# Altium PCB 606-100863-r02.pcbdoc (part 2 of 2)
Units mm, origin at the board's own origin, x right, y up, seen from the top; angles counter-clockwise.
Board outline 84 x 22 mm, 2 copper layers (Top Layer, Bottom Layer), stack 1.471 mm thick; 42 components, 21 nets, 119 pads, 46 vias.
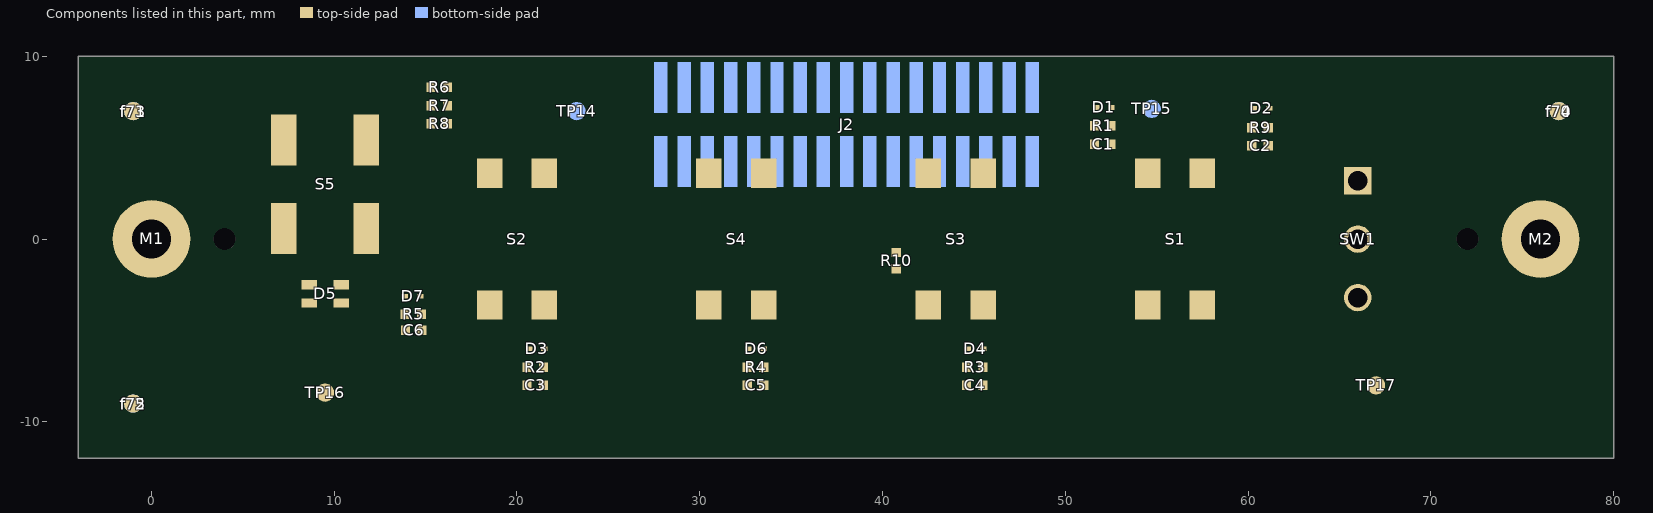
[diagram p2: the components of this part, seen from the top]

## Silkscreen, mask and mechanical layers (free items; w line width, h text height) (continued)
ASY_DWG_R:
  lines w0.3: -351.63,-119.37 -210.63,-119.37 ; -351.63,-85.37 -210.63,-85.37 ; -350.63,-103.37 -210.63,-103.37 ; -319.63,-119.37 -319.63,-103.37 ; -223.63,-119.37 -223.63,-103.37 ; -210.63,-125.37 -210.63,-65.37
  lines w0.508: -131.652,375.834 -131.652,388.788 ; -131.652,375.834 -131.652,388.788 ; -131.652,375.834 -131.652,388.788 ; -371.174,-0.721 -351.87,-0.721 -371.174,-0.721 ; -371.174,-0.264 -351.87,-0.264 -371.174,-0.264 ; -371.174,124.704 -351.87,124.704 -371.174,124.704 ; -371.174,125.161 -351.87,125.161 -371.174,125.161 ; -371.174,250.129 -351.87,250.129 -371.174,250.129 ; -371.174,250.586 -351.87,250.586 -371.174,250.586 ; -241.888,-138.821 -241.888,-125.867 -241.888,-138.821 ; -241.863,375.834 -241.863,388.788 -241.863,375.834 ; -241.431,-138.821 -241.431,-125.867 -241.431,-138.821 ; -241.406,376.088 -241.406,388.788 -241.406,376.088 ; -131.195,375.834 -131.195,388.788 -131.195,375.834 ; -21.442,375.834 -21.442,388.788 -21.442,375.834 ; -20.985,375.834 -20.985,388.788 -20.985,375.834 ; 88.82,-138.821 88.82,-125.867 88.82,-138.821 ; 88.82,375.834 88.82,388.788 88.82,375.834 ; 89.277,-138.821 89.277,-125.867 89.277,-138.821 ; 89.277,375.834 89.277,388.788 89.277,375.834 ; 199.056,-138.821 199.056,-125.867 199.056,-138.821 ; 199.056,375.834 199.056,388.788 199.056,375.834 ; 199.513,-138.821 199.513,-125.867 199.513,-138.821 ; 199.513,375.834 199.513,388.788 199.513,375.834 ; 309.266,-138.821 309.266,-125.867 309.266,-138.821 ; 309.266,375.834 309.266,388.788 309.266,375.834 ; 309.723,-138.821 309.723,-125.867 309.723,-138.821 ; 309.723,375.834 309.723,388.788 309.723,375.834 ; 419.655,-0.721 438.959,-0.721 419.655,-0.721 ; 419.655,-0.264 438.959,-0.264 419.655,-0.264 ; 419.655,124.678 438.959,124.678 419.655,124.678 ; 419.655,125.136 438.959,125.136 419.655,125.136 ; 419.655,250.078 438.959,250.078 419.655,250.078 ; 419.655,250.535 438.959,250.535 419.655,250.535
  lines w1: -351.63,-125.37 419.37,-125.37 419.37,375.63 -351.63,375.63 -351.63,-125.37
  lines w1.1: -130.63,-138.37 -130.63,-125.37 ; -21.63,-138.37 -21.63,-125.37
  text "1" at -294.466,379.618 h7.62
  text "6" at 256.866,379.44 h7.62
  text "5" at 146.274,379.364 h7.62
  text "7" at 366.797,379.313 h7.62
  text "2" at -184.129,379.212 h7.62
  text "3" at -74.096,379.212 h7.62
  text "4" at 36.673,379.212 h7.62
  text "NOTES: UNLESS OTHERWISE SPECIFIED" at 407.245,363.53 h2.03
  text "1   RoHS COMPLIANT ASSEMBLY REQUIRED. ASSEMBLE PER IPC-A-610, CLASS 2," at 407.145,357.03 h2.03
  text "2   AQUEOUS BASED CLEANING AFTER SOLDER FOR ALL COMPONENTS IS PREFERRED, NO-CLEAN" at 407.051,351.825 h2.03
  text "RoHS SOLDER PROCESS IS ACCEPTABLE." at 407.195,347.68 h2.03
  text "3   ITEM IDENTIFICATION: MARK REVISION NUMBER OF THIS DRAWING IN THE SPACE PROVIDED." at 407.37,341.88 h2.03
  text "D" at -356.315,309.946 h7.62
  text "D" at 428.367,309.794 h7.62
  text "C" at -356.315,184.495 h7.62
  text "C" at 428.494,184.292 h7.62
  text "B" at -356.442,58.892 h7.62
  text "B" at 428.265,58.892 h7.62
  text "ASSEMBLY BOTTOM" at 57.054,-25.345 h3.81
  text "A" at -356.188,-66.863 h7.62
  text "A" at 428.519,-66.99 h7.62
  text "1511 Sixth Ave. Suite 300, Seattle, WA 98101 206.381.0898" at -222.718,-83.37 h2.54
  text "PRINTED CIRCUIT BOARD ASSEMBLY" at -235.41,-91.87 h3.81
  text ".Board_Name" at -249.314,-100.145 h5.08
  text "REV" at -333.494,-106.37 h1.78
  text "DWG NO" at -225.63,-106.37 h1.78
  text "SIZE" at -214.782,-106.37 h1.78
  text "600-" at -241.385,-116.071 h7.62
  text ".Board_Number" at -271.085,-116.171 h7.62
  text "D" at -214.582,-116.37 h7.62
  text ".PCB_Revision" at -329.919,-116.892 h7.62
  text "SHEET 2 OF 2" at -327.086,-123.37 h1.78
  text "SCALE:4:1" at -216.222,-123.37 h1.78
  text "1" at -294.67,-135.418 h7.62
  text "5" at 146.351,-135.57 h7.62
  text "6" at 256.79,-135.57 h7.62
  text "4" at 36.902,-135.849 h7.62
  text "2" at -184.357,-135.875 h7.62
  text "3" at -73.918,-135.875 h7.62
  text "7" at 366.899,-136.434 h7.62
TITLEBLOCK:
  lines w0.25: -29.53,-63.87 91.47,-63.87 ; 28.97,-44.87 91.47,-44.87 91.47,-73.37 -29.53,-73.37 -29.53,-51.37 91.47,-51.37 ; 46.97,-73.37 46.97,-44.87 ; 46.97,-56.37 91.47,-56.37 ; 80.47,-63.87 80.47,-56.37
  text "PRODUCT" at 33.214,-47.37 h1.52
  text "1511 SIXTH AVENUE, THIRD FLOOR" at 47.97,-47.37 h1.52
  text "DEVELOPMENT" at 31.282,-50.37 h1.52
  text "SEATTLE,WA 98101  206.381.0898" at 47.97,-50.37 h1.52
  text "DATE" at 47.97,-53.37 h1.02
  text "09/22/2016" at 60.85,-54.87 h2.03
  text "PRINTED CIRCUIT BOARD" at -10.766,-55.87 h2.29
  text "PART NUMBER" at 47.97,-58.37 h1.02
  text "REV" at 84.746,-58.37 h1.02
  text ".Board_Name" at -16.5,-62 h3.81
  text "601-" at 53.625,-62.071 h2.54
  text ".Board_Number" at 63.925,-62.071 h2.54
  text ".PCB_Revision" at 83.77,-62.538 h2.54
  text "PROPRIETARY AND CONFIDENTIAL" at 52.196,-66.87 h1.52
  text "THE INFORMATION CONTAINED IN THIS DRAWING IS PROPRIETARY AND" at 50.98,-68.87 h0.76
  text "RESTRICTED. ANY REPRODUCTION IN PART OR WHOLE WITHOUT THE" at 51.892,-70.37 h0.76
  text "EXPRESS WRITTEN PERMISSION OF THE OWNER IS PROHIBITED" at 52.608,-71.87 h0.76
DXF_JULY14_TOP:
  drawing of 175 lines, arcs and shapes, not listed
  text "BOARD OUTLINE" at 36,145 h3.17
  text "PRIMARY" at -12.89,128.49 h3.17
  text "COMPONENT PLACEMENT" at 26,109 h3.17
  text "KEEP WITHIN/KEEP OUT" at 21,72 h3.17
DXF_JULY14_BOT:
  circle w0.013: c72,0 r0.6
  circle w0.013: c4,0 r0.6
  circle w0.013: c76,0 r2.5
  circle w0.013: c76,0 r1.075
  circle w0.013: c0,0 r2.5
  circle w0.013: c0,0 r1.075
  circle w0.013: c76,0 r1.075
  circle w0.013: c72,0 r0.6
  circle w0.013: c4,0 r0.6
  circle w0.013: c0,0 r1.075
  circle w0.013: c-1.629,141.596 r1.075
  circle w0.013: c2.371,141.596 r0.6
  circle w0.013: c70.371,141.596 r0.6
  circle w0.013: c74.371,141.596 r1.075
  circle w0.013: c-1.614,31.945 r1.075
  circle w0.013: c-1.614,31.945 r2.5
  circle w0.013: c74.386,31.945 r1.075
  circle w0.013: c74.386,31.945 r2.5
  circle w0.013: c2.386,31.945 r0.6
  circle w0.013: c70.386,31.945 r0.6
  circle w0.013: c0.092,93.609 r1.075
  circle w0.013: c4.092,93.609 r0.6
  circle w0.013: c72.092,93.609 r0.6
  circle w0.013: c76.092,93.609 r1.075
  lines w0.013: -4,-12 -4,10 ; -4,-12 80,-12 ; -4,-12 -4,10 ; -4,-12 80,-12 ; -4,10 80,10 ; -4,10 80,10 ; 80,-12 80,10 ; 80,-12 80,10 ; -5.629,129.596 78.371,129.596 78.371,151.596 -5.629,151.596 -5.629,129.596 ; -5.614,19.945 78.386,19.945 78.386,41.945 -5.614,41.945 -5.614,19.945 ; -3.908,81.609 80.092,81.609 80.092,103.609 -3.908,103.609 -3.908,81.609 ; 27.205,5.82 27.205,9.25 48.795,9.25 48.795,5.82 27.205,5.82 ; 27.297,99.429 48.887,99.429 48.887,102.859 27.297,102.859 27.297,99.429 ; 28.085,6.7 28.085,8.37 47.915,8.37 47.915,6.7 28.085,6.7 ; 28.177,100.309 48.007,100.309 48.007,101.979 28.177,101.979 28.177,100.309
  text "BOARD OUTLINE" at 53,157 h3.17
  text "SECONDARY" at -22,140 h3.17
  text "COMPONENT PLACEMENT" at 64,109 h3.17
  text "KEEP WITHIN/KEEP OUT" at 61,46 h3.17
DXF_JULY21_TOP:
  circle w0.013: c9.5,3 r1.75
  circle w0.013: c76,0 r1.075
  circle w0.013: c4,0 r0.6
  circle w0.013: c72,0 r0.6
  circle w0.013: c0,0 r1.075
  circle w0.013: c56,0 r1.25
  circle w0.013: c32,0 r1.25
  circle w0.013: c20,0 r1.25
  circle w0.013: c44,0 r1.25
  circle w0.013: c303.092,49.784 r1.075
  circle w0.013: c299.092,49.784 r0.6
  circle w0.013: c231.092,49.784 r0.6
  circle w0.013: c227.092,49.784 r1.075
  circle w0.013: c184.386,50.12 r0.6
  circle w0.013: c116.386,50.12 r0.6
  circle w0.013: c188.386,50.12 r2.5
  circle w0.013: c188.386,50.12 r1.075
  circle w0.013: c112.386,50.12 r2.5
  circle w0.013: c112.386,50.12 r1.075
  circle w0.013: c76.371,50.771 r1.075
  circle w0.013: c72.371,50.771 r0.6
  circle w0.013: c4.371,50.771 r0.6
  circle w0.013: c0.371,50.771 r1.075
  circle w0.013: c270.744,116.355 r1.25
  circle w0.013: c246.744,116.355 r1.25
  circle w0.013: c258.744,116.355 r1.25
  circle w0.013: c282.744,116.355 r1.25
  circle w0.013: c226.744,116.355 r1.075
  circle w0.013: c298.744,116.355 r0.6
  circle w0.013: c230.744,116.355 r0.6
  circle w0.013: c302.744,116.355 r1.075
  circle w0.013: c236.244,119.355 r1.75
  circle w0.013: c117.382,117.195 r0.6
  circle w0.013: c113.382,117.195 r1.075
  circle w0.013: c189.382,117.195 r1.075
  circle w0.013: c185.382,117.195 r0.6
  circle w0.013: c-2.5,116.775 r1.075
  circle w0.013: c1.5,116.775 r0.6
  circle w0.013: c69.5,116.775 r0.6
  circle w0.013: c73.5,116.775 r1.075
  lines w0.013: 119.382,105.195 183.382,105.195 ; 119.382,105.195 109.382,105.195 109.382,127.195 119.382,127.195 ; 119.382,105.195 119.382,127.195 ; 119.382,127.195 183.382,127.195 ; 183.382,105.195 183.382,127.195 ; 183.382,105.195 193.382,105.195 193.382,127.195 183.382,127.195 ; -6.5,104.775 -6.5,126.775 77.5,126.775 77.5,104.775 -6.5,104.775 ; -4,-12 -4,10 80,10 80,-12 -4,-12 ; -3.629,38.771 -3.629,60.771 80.371,60.771 80.371,38.771 -3.629,38.771 ; 6.5,0 6.5,6 12.5,6 12.5,0 6.5,0 ; 8.6,-3.9 8.6,-2.1 10.4,-2.1 10.4,-3.9 8.6,-3.9 ; 17.75,-2.25 22.25,-2.25 22.25,2.25 17.75,2.25 17.75,-2.25 ; 29.75,-2.25 29.75,2.25 34.25,2.25 34.25,-2.25 29.75,-2.25 ; 41.75,-2.25 46.25,-2.25 46.25,2.25 41.75,2.25 41.75,-2.25 ; 53.75,-2.25 53.75,2.25 58.25,2.25 58.25,-2.25 53.75,-2.25 ; 63.079,-5.626 68.921,-5.626 68.921,5.626 63.079,5.626 63.079,-5.626 ; 64.273,0 64.273,3.429 67.727,3.429 67.727,0 64.273,0 ; 108.386,38.12 108.386,60.12 192.386,60.12 192.386,38.12 108.386,38.12 ; 222.744,104.355 306.744,104.355 306.744,126.355 222.744,126.355 222.744,104.355 ; 223.092,37.784 223.092,59.784 307.092,59.784 307.092,37.784 223.092,37.784 ; 233.244,116.355 239.244,116.355 239.244,122.355 233.244,122.355 233.244,116.355 ; 235.344,112.455 237.144,112.455 237.144,114.255 235.344,114.255 235.344,112.455 ; 244.494,114.105 244.494,118.605 248.994,118.605 248.994,114.105 244.494,114.105 ; 254.297,55.604 254.297,59.034 275.887,59.034 275.887,55.604 254.297,55.604 ; 255.177,56.484 255.177,58.154 275.007,58.154 275.007,56.484 255.177,56.484 ; 256.494,114.105 260.994,114.105 260.994,118.605 256.494,118.605 256.494,114.105 ; 268.494,114.105 268.494,118.605 272.994,118.605 272.994,114.105 268.494,114.105 ; 280.494,114.105 284.994,114.105 284.994,118.605 280.494,118.605 280.494,114.105 ; 289.823,110.729 289.823,121.981 295.665,121.981 295.665,110.729 289.823,110.729 ; 291.017,116.355 294.471,116.355 294.471,119.784 291.017,119.784 291.017,116.355
  text "KEEP WITHIN/KEEP OUT" at 128.09,147.012 h3.17
  text "BOARD OUTLINE" at 14.923,145.752 h3.17
  text "COMPONENT PLACEMENT" at 243.916,145.131 h3.17
  text "PRIMARY" at -32.89,114.665 h3.17
  text "SECONDARY" at -36.821,51.369 h3.17
Drill Drawing:
  circle w0.254: c119.937,-8.007 r0.508
  circle w0.254: c119.937,-8.007 r0.847
  lines w0.254: 119.09,-16.05 119.513,-16.05 119.513,-16.473 120.36,-16.473 120.36,-16.05 120.783,-16.05 120.783,-15.203 120.36,-15.203 120.36,-14.78 119.513,-14.78 119.513,-15.203 119.09,-15.203 119.09,-16.05 ; 119.09,-12.24 119.513,-12.24 119.937,-12.663 120.36,-12.24 120.783,-12.24 120.36,-11.817 120.783,-11.393 120.36,-11.393 119.937,-10.97 119.513,-11.393 119.09,-11.393 119.513,-11.817 119.09,-12.24 ; 119.09,-5.043 120.783,-5.043 120.783,-3.35 119.09,-3.35 119.09,-5.043 ; 119.09,-0.387 119.937,-1.233 120.783,-0.387 119.937,0.46 119.09,-0.387 ; 119.429,-12.071 119.683,-12.071 119.937,-12.325 120.191,-12.071 120.445,-12.071 120.191,-11.817 120.445,-11.563 120.191,-11.563 119.937,-11.309 119.683,-11.563 119.429,-11.563 119.683,-11.817 119.429,-12.071
  lines w0.381: 117.571,-17.616 337.018,-17.616 ; 117.571,1.434 337.018,1.434 ; 131.564,-21.426 131.564,5.244 ; 145.276,-21.426 145.276,5.244 ; 172.954,-21.426 172.954,5.244 ; 185.803,-21.426 185.803,5.244 ; 204.442,-21.426 204.442,5.244 ; 242.531,-21.426 242.531,5.244 ; 257.513,-21.426 257.513,5.244 ; 276.456,-21.426 276.456,5.244 ; 308.197,-21.426 308.197,5.244 ; 117.571,-21.426 337.018,-21.426 337.018,5.244 117.571,5.244 117.571,-21.426
  text "Symbol" at 119.857,2.577 h1.83
  text "Count" at 132.707,2.577 h1.83
  text "Hole Size" at 146.419,2.577 h1.83
  text "Plated" at 174.097,2.577 h1.83
  text "Hole Type" at 186.946,2.577 h1.83
  text "Drill Layer Pair" at 205.585,2.577 h1.83
  text "Via/Pad" at 243.674,2.577 h1.83
  text "Pad Shape" at 258.656,2.577 h1.83
  text "Template" at 277.599,2.577 h1.83
  text "Hole Tolerance" at 309.34,2.577 h1.83
  text "44" at 132.707,-1.233 h1.52
  text "0.250mm (9.84mil)" at 146.419,-1.233 h1.52
  text "PTH" at 174.097,-1.233 h1.52
  text "Round" at 186.946,-1.233 h1.52
  text "Top Layer - Bottom Layer" at 205.585,-1.233 h1.52
  text "Via" at 243.674,-1.233 h1.52
  text "Rounded" at 258.656,-1.233 h1.52
  text "v50h25m0mx0(Tol0-25)" at 277.599,-1.233 h1.52
  text "+0.000mm/-0.250mm" at 309.34,-1.233 h1.52
  text "2" at 132.707,-5.043 h1.52
  text "0.250mm (9.84mil)" at 146.419,-5.043 h1.52
  text "PTH" at 174.097,-5.043 h1.52
  text "Round" at 186.946,-5.043 h1.52
  text "Top Layer - Bottom Layer" at 205.585,-5.043 h1.52
  text "Via" at 243.674,-5.043 h1.52
  text "Rounded" at 258.656,-5.043 h1.52
  text "v50h25m0mx0" at 277.599,-5.043 h1.52
  text "3" at 132.707,-8.853 h1.52
  text "1.070mm (42.13mil)" at 146.419,-8.853 h1.52
  text "PTH" at 174.097,-8.853 h1.52
  text "Round" at 186.946,-8.853 h1.52
  text "Top Layer - Bottom Layer" at 205.585,-8.853 h1.52
  text "Pad" at 243.674,-8.853 h1.52
  text "(Mixed)" at 258.656,-8.853 h1.52
  text "(Mixed)" at 277.599,-8.853 h1.52
  text "+/-0.076mm" at 309.34,-8.853 h1.52
  text "2" at 132.707,-12.663 h1.52
  text "1.200mm (47.24mil)" at 146.419,-12.663 h1.52
  text "NPTH" at 174.097,-12.663 h1.52
  text "Round" at 186.946,-12.663 h1.52
  text "Top Layer - Bottom Layer" at 205.585,-12.663 h1.52
  text "Pad" at 243.674,-12.663 h1.52
  text "Rounded" at 258.656,-12.663 h1.52
  text "c120hn120(Tol8-8)" at 277.599,-12.663 h1.52
  text "+/-0.076mm" at 309.34,-12.663 h1.52
  text "2" at 132.707,-16.473 h1.52
  text "2.150mm (84.65mil)" at 146.419,-16.473 h1.52
  text "PTH" at 174.097,-16.473 h1.52
  text "Round" at 186.946,-16.473 h1.52
  text "Top Layer - Bottom Layer" at 205.585,-16.473 h1.52
  text "Pad" at 243.674,-16.473 h1.52
  text "Rounded" at 258.656,-16.473 h1.52
  text "c425h215(Tol8-8)" at 277.599,-16.473 h1.52
  text "+/-0.076mm" at 309.34,-16.473 h1.52
  text "53 Total" at 132.707,-20.283 h1.52
  text ".Layer_Name" at 17.581,-25.042 h3.81

## Text inside footprints (layer, text, board x,y; h text height)
D1: Mechanical 32 "C" at 53.345,7.512 h0.64 r180; Mechanical 32 "A" at 51.34,7.52 h0.64 r180
D2: Mechanical 32 "C" at 61.975,7.462 h0.64 r180; Mechanical 32 "A" at 59.97,7.47 h0.64 r180
D3: Mechanical 32 "C" at 22.325,-5.688 h0.64 r180; Mechanical 32 "A" at 20.32,-5.68 h0.64 r180
D4: Mechanical 32 "C" at 46.325,-5.688 h0.64 r180; Mechanical 32 "A" at 44.32,-5.68 h0.64 r180
D6: Mechanical 32 "C" at 34.325,-5.688 h0.64 r180; Mechanical 32 "A" at 32.32,-5.68 h0.64 r180
D7: Mechanical 32 "C" at 13.043,-3.431 h0.64; Mechanical 32 "A" at 15.048,-3.44 h0.64
J2: Bottom Overlay "1" at 27.101,8.675 h0.76
M1: Mechanical 18 "1" at -1.771,0.011 h0.64
M2: Mechanical 18 "1" at 74.222,0 h0.64
SW1: Top Overlay "3" at 68,-6 h1 r270; Top Overlay "1" at 68,6.5 h1 r270